# Altium PCB V2.PcbDoc
Units mm, origin at the board's own origin, x right, y up, seen from the top; angles counter-clockwise.
Board outline 100 x 100 mm, 2 copper layers (Top Layer, Bottom Layer); 44 components, 29 nets, 132 pads, 0 vias.
Unrouted connection lines stored in the file: 6.
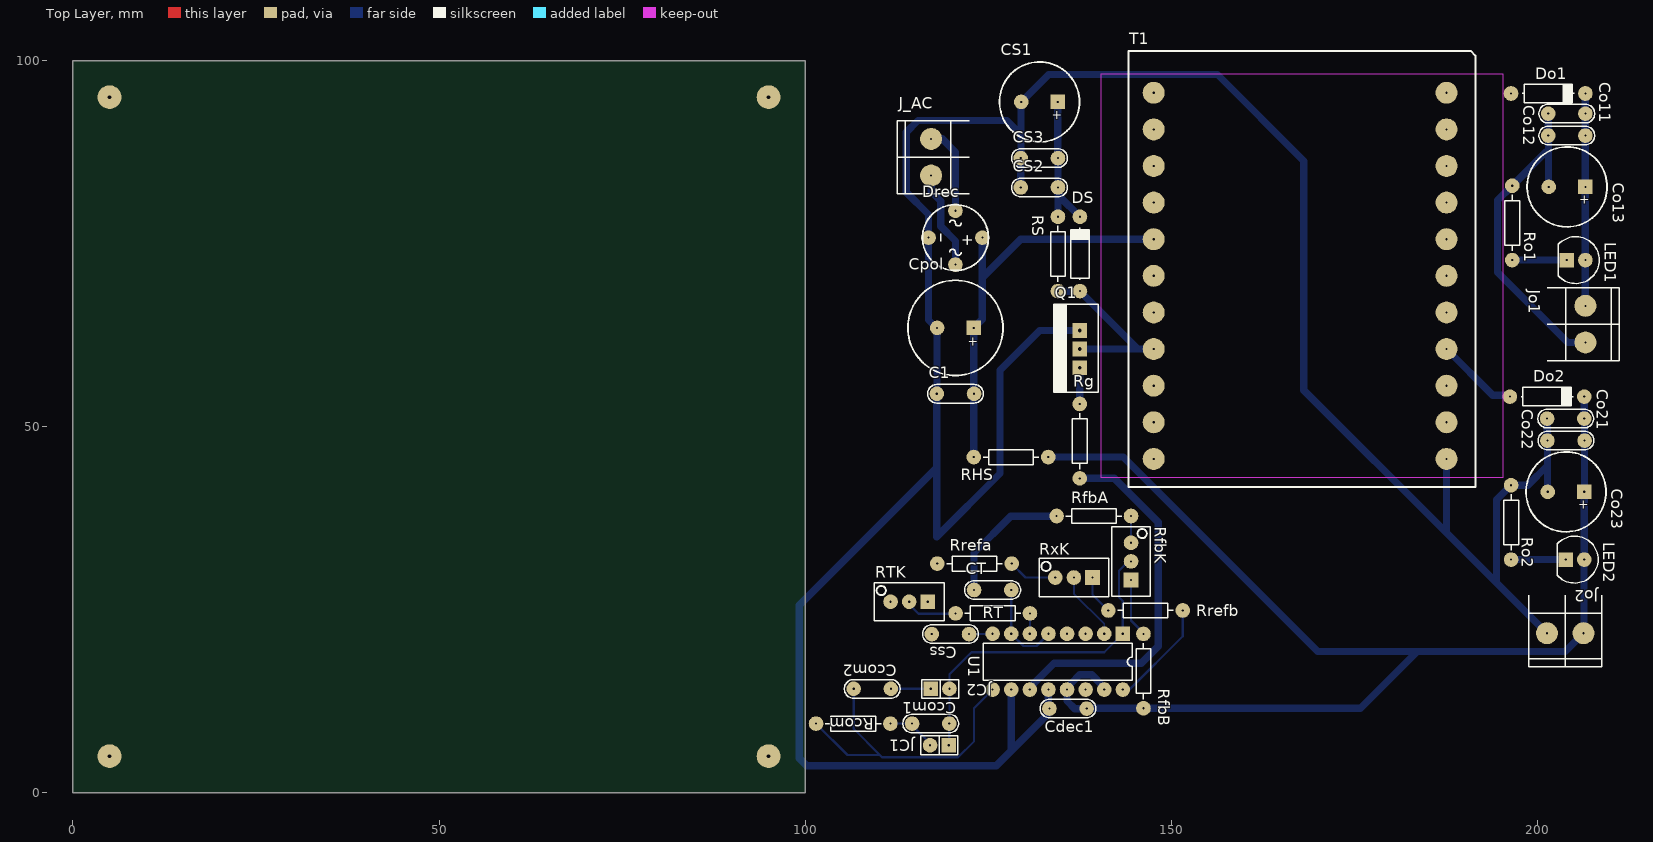
[diagram p0: Top Layer view]
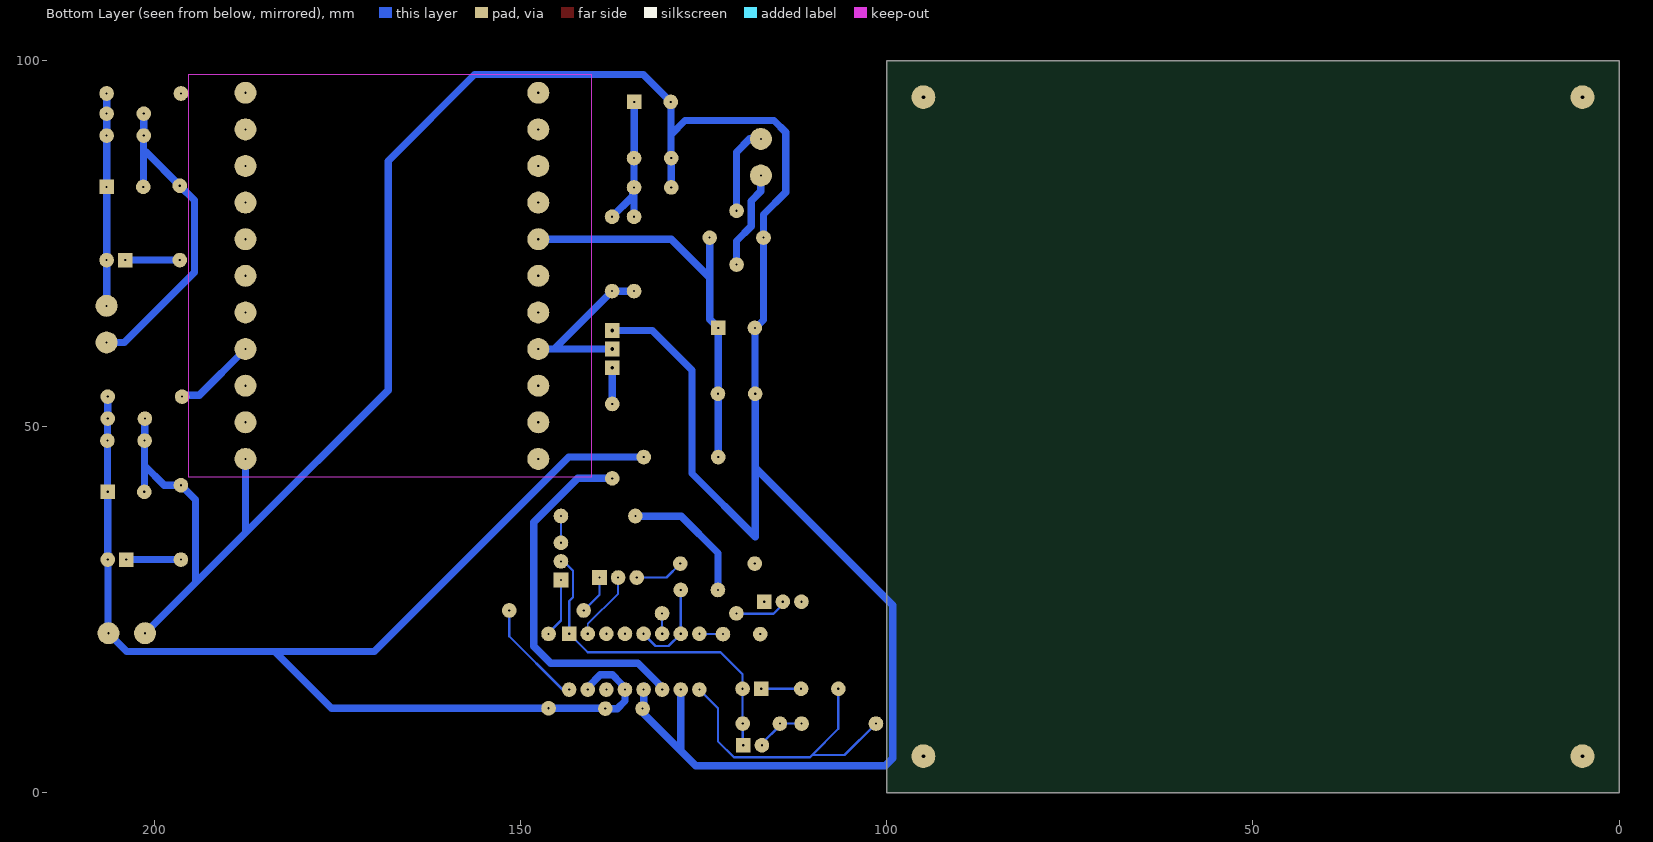
[diagram p1: Bottom Layer view, seen from below]

## Layer stack, top to bottom
Top Solder: solder mask 0.0102, Solder Resist, Dk 3.5
Top Layer: signal copper 0.0356
Dielectric 1: dielectric 0.32, FR-4, Dk 4.8
Bottom Layer: signal copper 0.0356
Bottom Solder: solder mask 0.0102, Solder Resist, Dk 3.5

## Board outline
0,0 0,100 100,100 100,0

## Design rules (kind name [scope] priority, off if disabled: settings)
Clearance [All] p1: gap=0.5 ignorepadtopadclearanceinfootprint=FALSE
PolygonConnect [All] p1: connectstyle=Relief reliefconductorwidth=0.254 reliefentries=4 polygonreliefangle="90 Angle" airgapwidth=0.254
RoutingVias [All] p1: holewidth=0.5 width=2 viastyle="Through Hole" minholewidth=0.3 minwidth=1.5 maxholewidth=0.5 maxwidth=2
SolderMaskExpansion [All] p1: expansion=0.102 istentingtop=FALSE
Width [All] p1: maxlimit=1 minlimit=0.25 preferedwidth=0.5
30 further rules are at their usual default settings.

## Components (designator, comment, footprint, x,y, rotation, side; value= is the part's Value field where it differs from the comment)
C1 "CAP" CAP200 120.52,54.492 r180 top
Ccom1 "CAP" CAP200 117.14,9.45 r0 top
Ccom2 "CAP" CAP200 109.16,14.2 r0 top
Cdec1 "CAP" CAP200 135.9,11.5 r180 top
Co11 "100n" CAP200 204.01,92.75 r180 top
Co12 "1u" CAP200 204.01,89.75 r180 top
Co13 "47u" CAP200RP 204.05,82.75 r180 top
Co21 "100n" CAP200 203.86,51.1 r180 top
Co22 "1u" CAP200 203.9,48.1 r180 top
Co23 "47u" CAP200RP 203.9,41.1 r180 top
Cpol "CAPPOL" CAP200RP2 120.52,63.492 r180 top
CS1 "CAPPOL" CAP200RP 132,94.35 r180 top
CS2 "" CAP200 131.984,82.675 r0 top
CS3 "" CAP200 131.984,86.675 r0 top
Css "CAP" CAP200 119.835,21.675 r180 top
CT "2n2" CAP200 125.6,27.7 r180 top
Do1 "DIODO" DO41 201.47,95.5 r0 top
Do2 "DIODO" DO41 201.32,54.1 r0 top
Drec "" "PUENTE - W10M" 124.197,75.815 r270 top
DS "Snubber" DO41 137.524,73.595 r90 top
J_AC "" BORNERA2 117.2,86.8 r0 top
JC1 "JUMPER" JUMPER2 118.33,6.5 r180 top
JC2 "JUMPER" JUMPER2 118.43,14.2 r0 top
Jo1 "BORNERA 2" BORNERA2 206.55,64 r180 top
Jo2 "BORNERA 2" BORNERA2 203.8,21.8 r90 top
LED1 "LED" LED5 205.28,72.75 r180 top
LED2 "LED" LED5 205.13,31.85 r180 top
Q1 "CMP-017-000063-1" "TO-220 V" 137.5,60.6 r90 top
Rcom "RES" RES400 101.48,9.45 r0 top
RfbA "1k" RES400 134.34,37.8 r0 top
RfbB "1k" RES400 146.2,21.7 r270 top
RfbK "1k" "PRESET V" 144.5,31.6 r90 top
Rg "100" RES400 137.5,42.94 r90 top
RHS "100k" RES400 133.19,45.85 r180 top
Ro1 "RES" RES400 196.55,82.91 r270 top
Ro2 "RES" RES400 196.4,31.85 r90 top
Rrefa "RES" RES400 128.2,31.3 r180 top
Rrefb "RES" RES400 151.56,24.9 r180 top
RS "" RES400 134.524,68.515 r90 top
RT "3k9" RES400 130.7,24.5 r180 top
RTK "1k" "PRESET V" 114.2,26.1 r180 top
RxK "PRESET" "PRESET V" 136.7,29.4 r180 top
T1 "E55/28/21" E55/28/21 147.59,95.6 r0 top
U1 "IC_DIP16" DIP16 143.38,21.72 r270 top

## Footprints (in the part's own frame and the unit in brackets; to place one, negate y for a bottom-side part, rotate by r counter-clockwise, add the part's x,y. Pads: shape width x height; smd on the part's side, far side on the other; paste and mask are expansions set on the pad)
BORNERA2 [mm] "Bornera con Tornillos 5mm separación"
  round 3 hole 0.3: 1(0,2.5) 2(0,-2.5)
  silkscreen extent -4.6,-5 5.2,5, body extent -3.76,-4.89 3.94,5.61, height 10
CAP200 [mm]
  round 2 hole 0.3: 1(-2.54,0) 2(2.54,0)
  silkscreen extent -3.81,-1.27 3.81,1.27, body extent -2.79,-1.17 2.79,1.12, height 6.24
CAP200RP [mm] "Body Diameter 10.33mm"
  rect 2x2 hole 0.3: 1(-2.5,0)
  round 2 hole 0.3: 2(2.5,0)
  silkscreen extent -5.46,-5.46 5.46,5.46, body extent -5.2,-5.18 5.18,5.21, height 20
CAP200RP2 [mm] "Body Diameter 12.5mm"
  rect 2x2 hole 0.3: 1(-2.5,0)
  round 2 hole 0.3: 2(2.5,0)
  silkscreen extent -6.5,-6.5 6.5,6.5, body extent -6.25,-6.23 6.2,6.25, height 20
DIP16 [mm]
  rect 2x2 hole 0.3: 1(0,0)
  round 2 hole 0.3: 2(0,-2.54) 3(0,-5.08) 4(0,-7.62) 5(0,-10.16) 6(0,-12.7) 7(0,-15.24) 8(0,-17.78) 9(7.62,-17.78) 10(7.62,-15.24) 11(7.62,-12.7) 12(7.62,-10.16) 13(7.62,-7.62) 14(7.62,-5.08) 15(7.62,-2.54) 16(7.62,0)
  silkscreen extent 1.27,-19.05 6.35,1.27, body extent -0.08,-18.89 7.79,1.11, height 1.98
DO41 [mm]
  round 2 hole 0.3: 1(-5.08,0) 2(5.08,0)
  silkscreen extent -3.56,-1.27 3.56,1.27, body extent -5.46,-1.19 5.46,1.37, height 2.03
E55/28/21 [mm] "Transistor Coil E55/28/21"
  round 3 hole 0.3: 1(0,0) 2(0,-5) 3(0,-10) 4(0,-15) 5(0,-20) 6(0,-25) 7(0,-30) 8(0,-35) 9(0,-40) 10(0,-45) 11(0,-50) 12(40,0) 13(40,-5) 14(40,-10) 15(40,-15) 16(40,-20) 17(40,-25) 18(40,-30) 19(40,-35) 20(40,-40) 21(40,-45) 22(40,-50)
  silkscreen extent -3.43,-53.85 43.94,5.71
JUMPER2 [mm]
  rect 2x2 hole 0.3: 1(-1.27,0)
  round 2 hole 0.3: 2(1.27,0)
  silkscreen extent -2.54,-1.27 2.54,1.27, body extent -2.46,-1.27 2.54,1.27, height 9.5
LED5 [mm]
  round 2 hole 0.3: 1(-1.27,0)
  rect 2x2 hole 0.3: 2(1.27,0)
  silkscreen extent -3.16,-3.2 2.43,3.2, body extent -2.96,-2.97 2.46,3.05, height 12.31
"PRESET V" [mm]
  rect 2x2 hole 0.3: 1(-2.54,0)
  round 2 hole 0.3: 2(0,0) 3(2.54,0)
  silkscreen extent -4.76,-2.6 4.76,2.6, body extent -4.7,-2.42 4.83,2.42, height 11.55
"PUENTE - W10M" [mm]
  round 2 hole 0.3: 1(0,0) 2(-3.677,-3.677) 3(0,-7.354) 4(3.677,-3.677)
  silkscreen extent -4.5,-8.17 4.5,0.82
RES400 [mm]
  round 2 hole 0.3: 1(0,0) 2(10.16,0)
  silkscreen extent 1.27,-1.02 8.89,1.02, body extent -0.3,-1.14 10.46,1.17, height 2.43
"TO-220 V" [mm]
  rect 2x2 hole 0.5: 1(-2.54,0) 2(0,0) 3(2.54,0)
  silkscreen extent -5.9,-2.54 6.1,3.54, body extent -5,-2 5,3, height 18

## Part data
C1 Co11 Co21 Co22 CS2 CS3 Css: library part CMP-006-000000-1, Design Item ID=CAP, Source=Schematics.SchLib
Ccom1 Ccom2 Cdec1 CT: library part CMP-024-000000-1, Component Type=Standard, Design Item ID=CAP, Pin Count=2, Source=Schematics.SchLib
Co12: library part CMP-024-000002-1, Component Type=Standard, Design Item ID=CAP, Pin Count=2, Source=Schematics.SchLib
Co13 Co23 Cpol CS1: library part CMP-006-000001-1, Design Item ID=CAPPOL, Source=Schematics.SchLib
Do1 Do2 DS: library part CMP-008-000001-1, Design Item ID=DIODO, Source=Schematics.SchLib
Drec: library part CMP-008-000003-1, Design Item ID=PUENTE, Source=Schematics.SchLib
J_AC Jo1 Jo2: library part CMP-017-000066-1, Design Item ID="BORNERA 2", Source=Schematics.SchLib
JC1 JC2: library part CMP-017-000037-1, Design Item ID=JUMPER, Source=Schematics.SchLib
LED1 LED2: library part CMP-026-000002-1, Component Type=Standard, Design Item ID=LED, Pin Count=2, Source=Schematics.SchLib
Rcom RfbA RfbB Rg RHS Ro1 Ro2 RS: library part CMP-013-000000-1, Design Item ID=RES, Source=Schematics.SchLib
RfbK RTK RxK: library part CMP-031-000001-1, Component Type=Standard, Design Item ID=PRESET, Pin Count=3, Source=Schematics.SchLib
Rrefa Rrefb RT: library part CMP-031-000002-1, Component Type=Standard, Design Item ID=RES, Pin Count=2, Source=Schematics.SchLib
T1: "Transistor E55/28/21"
U1: library part CMP-017-000059-1, Design Item ID=IC_DIP16, Source=Schematics.SchLib
Q1: Design Item ID="MOSFET N", Source=Schematics.SchLib

## Free pads (board coordinates)
  round 3.25 hole 0.5: 1(5,5) 2(5,95) 3(95,5) 4(95,95)

## Nets (pads, with @x,y where several pads share a name; then routed paths per layer and width w, separated by ;. In a path a pad name is that pad's centre, name@x,y a point inside that pad or via, vN(x,y) a via of type N, cw(c..) or ccw(c..) an arc to the next point about the centre after c; other vN are vias at no path point)
GND: C1.2 Cdec1.2 Co21.2 Co22.2 Co23.2 Cpol.2 CS1.2 CS2.1 CS3.1 Css.2 CT.2 Drec.3 Jo2.1 Q1.3 RfbA.1 Ro2.2 Rrefa.2 RTK.3 T1.22 U1.10 U1.12 | length 405.1
  Bottom Layer w1: RTK.3 RTK.3@111.851,26.291 ; Css.2@117.104,21.866 Css.2 ; Rrefa.2@118.006,31.266 Rrefa.2 ; CT.2 123.06,32.76 128.068,37.768 134.308,37.768 RfbA.1 ; U1.10 128.14,5.74 ; CS2.1 129.444,86.595 129.484,86.635 CS3.1 129.472,86.703 129.472,89.878 ; U1.12@133.029,14.58 133.029,14.291 U1.12 133.21,14.09 133.21,10.81 133.2,10.8 128.14,5.74 ; Q1.3 132.04,63.14 126.6,57.7 126.6,43.6 117.98,34.98 117.98,44.4 ; T1.22 187.59,35.51 ; Jo2.1 194.4,28.7 ; Co21.2 201.34,51.08 201.34,48.12 Co22.2 201.38,48.08 201.38,44.7 ; Co23.2 201.38,41.12 201.38,44.7 ; 117.98,44.4 C1.2 118,54.512 118,63.472 Cpol.2 117.929,63.492 116.843,64.578 Drec.3 116.843,78.971 113.8,82.014 113.8,90.2 115.4,91.8 127.55,91.8 129.472,89.878 ; 117.98,44.4 99.2,25.62 99.2,4.7 100.2,3.7 126.1,3.7 128.14,5.74 ; 129.472,89.878 129.472,94.322 CS1.2 133.25,98.1 156.3,98.1 168.108,86.292 168.108,54.992 187.59,35.51 ; 187.59,35.51 194.4,28.7 ; 194.4,28.7 194.4,40.01 Ro2.2 198.69,42.01 201.38,44.7
GNDo1: Co11.2 Co12.2 Co13.2 Jo1.1 Ro1.1 T1.15 | length 45.5
  Bottom Layer w1: Co11.2 Co12.2 201.51,89.71 201.51,87.46 ; Co13.2 201.51,82.79 201.51,87.46 ; Jo1.1 204.14,61.5 194.55,71.09 194.55,80.91 Ro1.1 201.1,87.46 201.51,87.46
L: Drec.2 J_AC.1 | length 12.1
  Bottom Layer w1: J_AC.1 118.7,89.3 120.52,87.48 Drec.2
N: Drec.4 J_AC.2 | length 13.5
  Bottom Layer w1: J_AC.2 117.2,82.15 118.52,80.83 118.52,77.349 120.52,75.349 Drec.4
NetCcom1_1: Ccom1.1 JC1.2 Rcom.2 | length 6.9
  Bottom Layer w0.3: Rcom.2 Ccom1.1 114.6,9.205 117.06,6.745 JC1.2
NetCcom2_2: Ccom2.2 JC2.1 | length 5.5
  Bottom Layer w0.3: Ccom2.2 JC2.1
NetCS1_1: CS1.1 CS2.2 CS3.2 DS.2 RS.2 | length 20.9
  Bottom Layer w1: CS1.1 134.512,94.338 134.512,86.687 CS3.2 CS2.2 ; RS.2 CS2.2 ; DS.2 134.716,81.484 134.716,82.484 CS2.2
NetCss_1: Css.1 U1.8 | length 3.3
  Bottom Layer w0.3: Css.1 122.388,21.688 125.608,21.688 U1.8@125.62,21.7
NetCT_1: CT.1 U1.5 U1.7 | length 12.4
  Bottom Layer w0.3: U1.7 CT.1 ; U1.7@128.16,21.7 129.81,20.05 131.59,20.05 133.22,21.68 U1.5
NetDo1_1: Do1.1 T1.12
NetDo2_1: Do2.1 T1.19 | length 11.3
  Bottom Layer w1: T1.19 193.899,54.291 196.049,54.291 Do2.1
NetDS_1: DS.1 Q1.2 RS.1 T1.8 | length 24.3
  Bottom Layer w1: RS.1 DS.1 145.439,60.6 ; Q1.2 145.439,60.6 ; T1.8 145.439,60.6
NetLED1_2: LED1.2 Ro1.2 | length 7.5
  Bottom Layer w1: Ro1.2 LED1.2
NetLED2_2: LED2.2 Ro2.1 | length 7.5
  Bottom Layer w1: Ro2.1 LED2.2
NetQ1_1: Q1.1 Rg.2 | length 5
  Bottom Layer w1: Rg.2 Q1.1
NetRfbA_2: RfbA.2 RfbK.3 | length 3.7
  Bottom Layer w0.3: RfbK.3 RfbA.2
NetRfbB_1: RfbB.1 RfbK.1 | length 8.1
  Bottom Layer w0.3: RfbK.1 144.5,23.519 146.2,21.819 RfbB.1
NetRrefa_1: Rrefa.1 RxK.3 | length 6.7
  Bottom Layer w0.3: Rrefa.1 130.1,29.4 RxK.3
NetRrefb_2: Rrefb.2 RxK.1 | length 5.4
  Bottom Layer w0.3: RxK.1 139.24,27.06 Rrefb.2
NetRT_1: RT.1 U1.6 | length 2.8
  Bottom Layer w0.3: U1.6 130.7,21.7 RT.1
NetRT_2: RT.2 RTK.2 | length 7.6
  Bottom Layer w0.3: RTK.2@114.2,26.479 RTK.2 114.2,25.721 115.471,24.45 120.49,24.45 RT.2
Vcom: Ccom2.1 Rcom.1 U1.9 | length 43
  Bottom Layer w0.3: Rcom.1 105.78,5.15 110.2,5.15 ; Ccom2.1 106.62,8.73 110.2,5.15 ; U1.9 123.072,11.572 123.072,7.053 120.869,4.85 110.5,4.85 110.2,5.15
Vd: C1.1 Cpol.1 Drec.1 RHS.2 T1.5 | length 56
  Bottom Layer w1: RHS.2 123.03,54.462 C1.1 123.04,54.512 123.04,63.472 Cpol.1 124.197,64.669 124.197,70.35 ; Drec.1 124.197,70.35 ; T1.5 129.447,75.6 124.197,70.35
Vfb: Ccom1.2 JC1.1 JC2.2 RfbK.2 U1.1 | length 46.7
  Bottom Layer w0.3: JC1.1 119.68,6.58 Ccom1.2 119.69,9.46 119.69,14.19 JC2.2 119.7,16.2 122.7,19.2 140.86,19.2 U1.1 143.38,26.185 142.85,26.715 142.85,30.329 144.121,31.6 RfbK.2
Vgg: Rg.1 U1.11 | length 50.3
  Bottom Layer w1: U1.11 130.68,14.371 131.22,14.911 131.22,14.928 133.992,17.7 145.9,17.7 148.2,20 148.2,36.928 142.188,42.94 Rg.1
VO1: Co11.1 Co12.1 Co13.1 Do1.2 Jo1.2 LED1.1 | length 29
  Bottom Layer w1: Jo1.2 LED1.1 Co13.1 Co12.1 Co11.1 Do1.2
VO2: Cdec1.1 Co21.1 Co22.1 Co23.1 Do2.2 Jo2.2 LED2.1 RfbB.2 RHS.1 U1.13 U1.15 | length 177.6
  Bottom Layer w1: RHS.1 143.438,45.85 169.988,19.3 183.6,19.3 ; U1.13 135.76,12.54 136.8,11.5 Cdec1.1 ; U1.13@135.76,14.371 136.3,14.911 136.3,14.928 137.472,16.1 139.128,16.1 140.649,14.58 140.649,14.291 U1.15 U1.15@140.988,13.952 ; Cdec1.1@138.44,11.54 RfbB.2 175.84,11.54 183.6,19.3 ; Do2.2 Co21.1 206.42,51.08 206.42,48.12 Co22.1@206.43,48.11 ; Co22.1 Co22.1@206.43,48.11 ; 183.6,19.3 203.8,19.3 Jo2.2 206.35,21.85 206.35,31.8 LED2.1 Co23.1 206.42,41.12 206.42,48.1 Co22.1@206.43,48.11
Vref: Rrefb.1 U1.16 | length 14.7
  Bottom Layer w0.3: U1.16 144.3,14.1 151.56,21.36 Rrefb.1
Vx: RxK.2 U1.2 | length 9.4
  Bottom Layer w0.25: RxK.2 136.7,27.2 140.84,23.06 U1.2
pads on no net: RTK.1 T1.1 T1.2 T1.3 T1.4 T1.6 T1.7 T1.9 T1.10 T1.11 T1.13 T1.14 T1.16 T1.17 T1.18 T1.20 T1.21 U1.3 U1.4 U1.14

## Keep-outs
Keep-Out Layer:
  region: 140.346,98.1 140.346,43.1 195.347,43.1 195.347,98.1

## Text inside footprints (layer, text, board x,y; h text height)
Co13: Top Overlay "+" at 207.174,81.505 h1.27 r180
Co23: Top Overlay "+" at 207.024,39.855 h1.27 r180
Cpol: Top Overlay "+" at 123.619,62.171 h1.27 r180
CS1: Top Overlay "+" at 135.124,93.105 h1.27 r180
Drec: Top Overlay "+" at 121.52,76.315 h1.52 r270